# Altium PCB Xbee_Coordinator.PcbDoc
Units mm, origin at the board's own origin, x right, y up, seen from the top; angles counter-clockwise.
Board outline 152.4 x 101.6 mm, 2 copper layers (Top Layer, Bottom Layer); 19 components, 27 nets, 107 pads, 0 vias.
Unrouted connection lines stored in the file: 37.
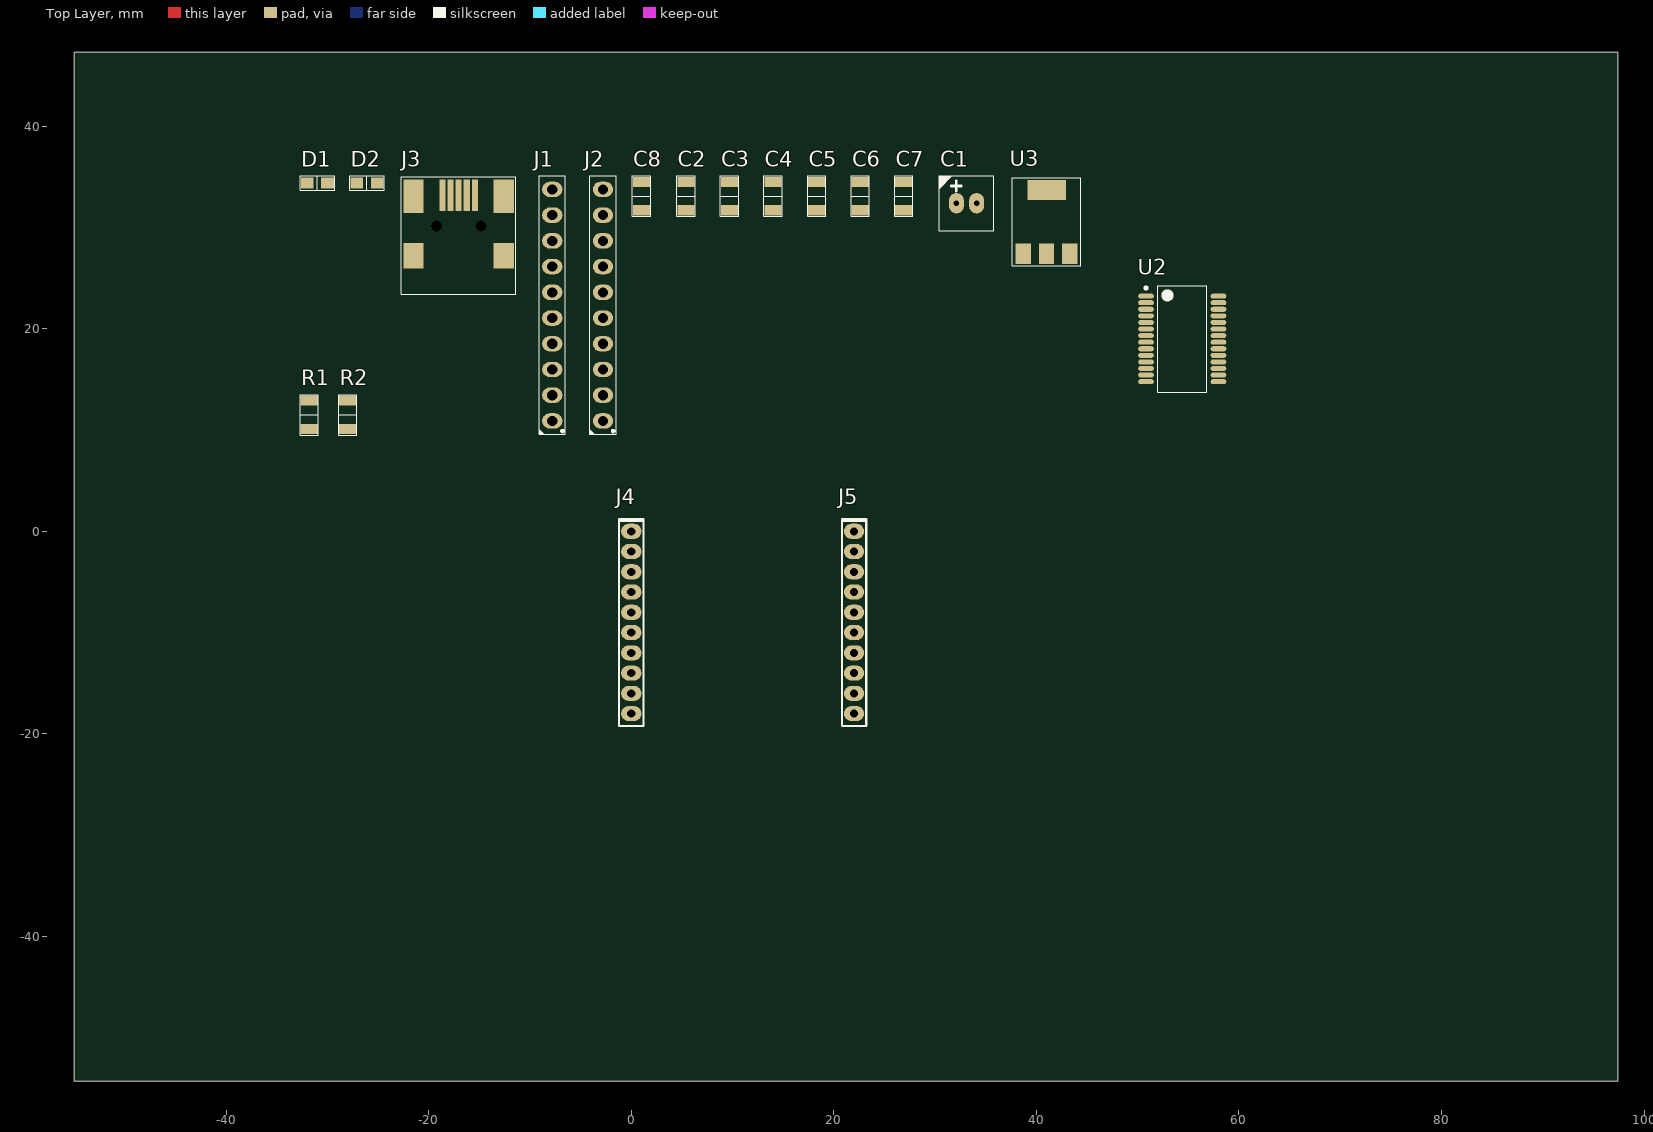
[diagram p0: Top Layer view]
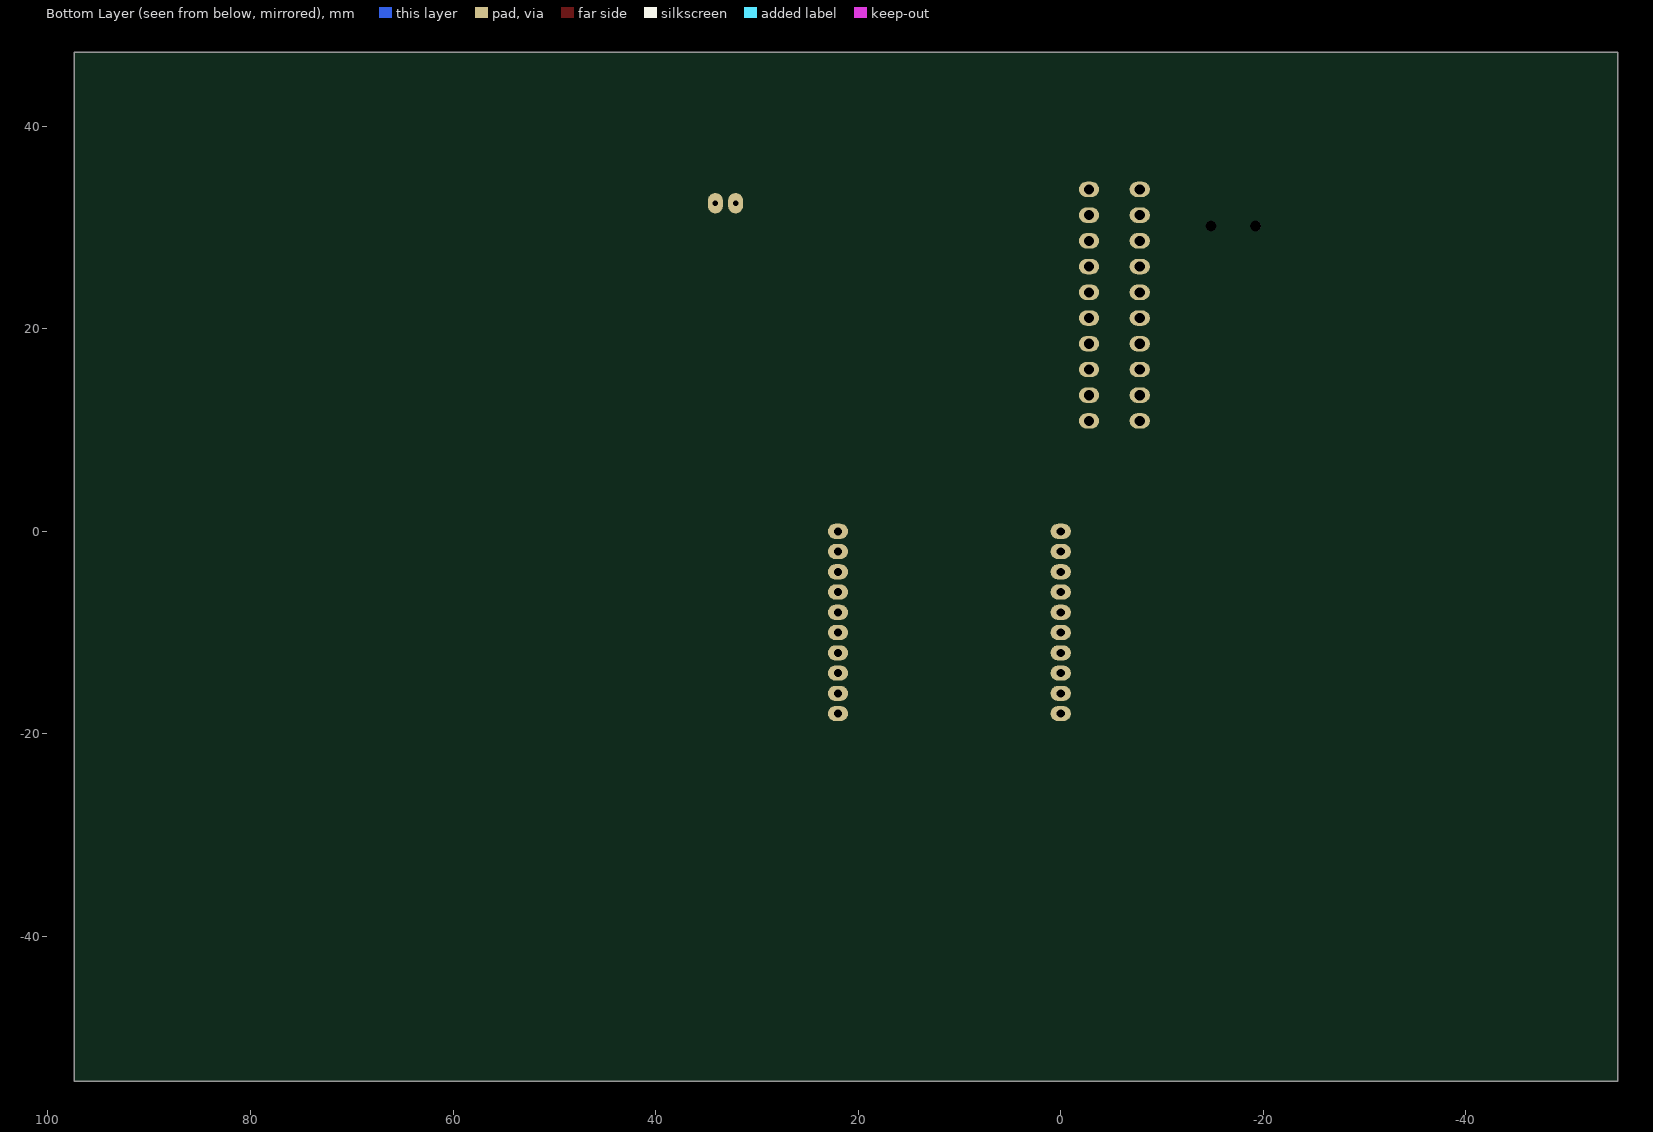
[diagram p1: Bottom Layer view, seen from below]

## Layer stack, top to bottom
Top Solder: solder mask 0.0102, Solder Resist, Dk 3.5
Top Layer: signal copper 0.0356
Dielectric 1: dielectric 0.32, FR-4, Dk 4.8
Bottom Layer: signal copper 0.0356
Bottom Solder: solder mask 0.0102, Solder Resist, Dk 3.5

## Board outline
-55,-54.3 97.4,-54.3 97.4,47.3 -55,47.3

## Design rules (kind name [scope] priority, off if disabled: settings)
Clearance [All] p1: gap=0.254 ignorepadtopadclearanceinfootprint=FALSE except(0: Arc-Hole Track-Hole SMDPad-Hole THPad-Hole Via-Hole Fill-Hole Poly-Hole Region-Hole Text-Hole; 0.1: Arc-SMDPad Track-SMDPad SMDPad-SMDPad)
PolygonConnect [All] p1: connectstyle=Relief reliefconductorwidth=0.254 reliefentries=4 polygonreliefangle="90 Angle" airgapwidth=0.254
RoutingVias [All] p1: holewidth=1 width=1.5 viastyle="Through Hole" minholewidth=0.5 minwidth=1 maxholewidth=0.6 maxwidth=2.54
SolderMaskExpansion [All] p1: expansion=0.102 istentingtop=FALSE
Width [All] p1: maxlimit=1 minlimit=0.254 preferedwidth=0.3 minimp=50.000000 maximp=50.000000 favimp=50.000000
30 further rules are at their usual default settings.

## Components (designator, comment, footprint, x,y, rotation, side; value= is the part's Value field where it differs from the comment)
C1 "1uF" "5x11 Radial Capacitor" 32.1,32.4 r0 top
C2 "10uF" C_1206 5.4,31.7 r0 top
C3 "1uF" C_1206 9.7,31.7 r0 top
C4 "0.1uF" C_1206 14,31.7 r0 top
C5 "0.1uF" C_1206 18.3,31.7 r0 top
C6 "1uF" C_1206 22.6,31.7 r0 top
C7 "10uF" C_1206 26.9,31.7 r0 top
C8 "0.1uF" C_1206 1,31.7 r0 top
D1 "LED_0805" LED_0805 -32,34.4 r0 top
D2 "LED_0805" LED_0805 -27.1,34.4 r0 top
J1 "Pin_Header_1x10Pos_2.54mm" PinHeader_1x10Pin_2.54mm -7.8,10.9 r90 top
J2 "Pin_Header_1x10Pos_2.54mm" PinHeader_1x10Pin_2.54mm -2.8,10.9 r90 top
J3 "Mini_USB" Mini_USB -21.5,27.2 r0 top
J4 "Header_1x10_2mm" "Header 1x10 2mm" 0,0 r270 top
J5 "Header_1x10_2mm" "Header 1x10 2mm" 22,0 r270 top
R1 "470" R_1206 -31.8,10.1 r0 top
R2 "1K" R_1206 -28,10.1 r0 top
U2 "FT232RL" SSOP-28Pin 54.4,19 r0 top
U3 "NCP1117 3.3V" "NCP1117 3.3V" 38.7,27.4 r0 top

## Footprints (in the part's own frame and the unit in brackets; to place one, negate y for a bottom-side part, rotate by r counter-clockwise, add the part's x,y. Pads: shape width x height; smd on the part's side, far side on the other; paste and mask are expansions set on the pad)
"5x11 Radial Capacitor" [mm]
  oval 1.5x2 hole 0.55 mask+0.05: 1(0,0) 2(2,0)
  silkscreen extent -1.7,-2.7 3.7,2.7, body extent -1.5,-2.5 3.5,2.5, height 11.2
C_1206 [mm]
  rect 1.7x1 smd mask+0.02: 1(0,0) 2(0,2.8)
  silkscreen extent -0.9,-0.6 0.9,3.4, body extent -0.9,-0.3 0.9,3.1, height 0.88
"Header 1x10 2mm" [mm]
  oval 1.5x2 hole 0.8: 1(0,0) 2(2,0) 3(4,0) 4(6,0) 5(8,0) 6(10,0) 7(12,0) 8(14,0) 9(16,0) 10(18,0)
  silkscreen extent -1.2,-1.2 19.2,1.2, body extent -1.25,-1.2 19.25,1.2, height 4.41
LED_0805 [mm]
  rect 1.25x1.1 smd mask+0.05: 1(0,0) 2(2,0)
  silkscreen extent -0.7,-0.7 2.7,0.7, body extent -0.1,-0.62 1.9,0.62, height 1.1
Mini_USB [mm]
  rect 0.6x3.1 smd mask+0.05: 1(2.85,6) 2(3.65,6) 3(4.45,6) 4(5.25,6) 5(6.05,6)
  rect 2x2.5 smd mask+0.05: ""(0,0) ""(8.9,0)
  rect 2x3.3 smd mask+0.05: ""(0,5.9) ""(8.9,5.9)
  round 1 hole 1.1 mask+0.02: ""(2.25,2.95) ""(6.65,2.95)
  silkscreen extent -1.2,-3.8 10.1,7.8, body extent -0.5,-2.9 9.4,6.3, height 4.14
"NCP1117 3.3V" [mm]
  rect 1.5x2 smd mask+0.05: 1(0,0) 2(2.3,0) 3(4.6,0)
  rect 3.8x2 smd mask+0.05: ""(2.3,6.3)
  silkscreen extent -1.1,-1.2 5.7,7.5, body extent -0.95,-0.5 5.55,6.5, height 1.73
PinHeader_1x10Pin_2.54mm [mm]
  oval 1.524x2 hole 1: 1(0,0) 2(2.54,0) 3(5.08,0) 4(7.62,0) 5(10.16,0) 6(12.7,0) 7(15.24,0) 8(17.78,0) 9(20.32,0) 10(22.86,0)
  silkscreen extent -1.3,-1.3 24.2,2.1, body extent -1.25,-1.26 24.15,1.28, height 9.4
R_1206 [mm]
  rect 1.7x1 smd mask+0.02: 1(0,0) 2(0,2.8)
  silkscreen extent -0.9,-0.6 0.9,3.4, body extent -0.83,-0.2 0.83,3, height 0.63
SSOP-28Pin [mm] "SOP, 28-Leads, Body 10,28x5,30mm, Pitch 0,65mm, IPC Medium Density"
  oval 1.55x0.5 smd mask+0.05: 1(-3.575,4.225) 2(-3.575,3.575) 3(-3.575,2.925) 4(-3.575,2.275) 5(-3.575,1.625) 6(-3.575,0.975) 7(-3.575,0.325) 8(-3.575,-0.325) 9(-3.575,-0.975) 10(-3.575,-1.625) 11(-3.575,-2.275) 12(-3.575,-2.925) 13(-3.575,-3.575) 14(-3.575,-4.225) 15(3.575,-4.225) 16(3.575,-3.575) 17(3.575,-2.925) 18(3.575,-2.275) 19(3.575,-1.625) 20(3.575,-0.975) 21(3.575,-0.325) 22(3.575,0.325) 23(3.575,0.975) 24(3.575,1.625) 25(3.575,2.275) 26(3.575,2.925) 27(3.575,3.575) 28(3.575,4.225)
  silkscreen extent -3.7,-5.25 2.4,5.25, body extent -3.88,-5.16 3.88,5.17, height 2.16

## Part data
C1: library part Cap_Pol_5x11, "5x11 Radial Polarized Capacitor"
C2 C3 C4 C5 C6 C7 C8: library part C_1206(3216), "1206(3216) package capacitor"
R1 R2: library part R_1206(3216), "1206(3216) package resistor"
U2: "FT232RL_USB-Converter"
U3: "NCP1117-3.3V Linear Regulator"

## Nets (pads, with @x,y where several pads share a name; then routed paths per layer and width w, separated by ;. In a path a pad name is that pad's centre, name@x,y a point inside that pad or via, vN(x,y) a via of type N, cw(c..) or ccw(c..) an arc to the next point about the centre after c; other vN are vias at no path point)
3.3V: U3.2
CTS: J2.9 J5.9 U2.11
DIO0: J2.1 J5.1
DIO1: J2.2 J5.2
DIO2: J2.3 J5.3
DIO3: J2.4 J5.4
DIO4: J2.10 J5.10
DIO5: J2.6 J5.6
DIO9: J2.8 J5.8
DIO11: J1.7 J4.7
DIO12: J1.4 J4.4
DTR: J1.9 J4.9 U2.2
GND: J1.10 J3.5 J4.10 U2.7 U2.18 U2.21 U2.25 U2.26 U3.1
NetC8_7: U2.4 U2.17
NetD1_9: 
NetD2_9: 
RES: J1.8 J4.8
RSSI: J1.6 J4.6
RST: J1.5 J4.5
RTS: J2.5 J5.5 U2.3
RX: J1.3 J4.3 U2.1
TX: J1.2 J4.2 U2.5
USBDM: J3.2 U2.16
USBDP: J3.3 U2.15
VBUS: J3.1 U2.20 U3.3
VDD: J1.1 J4.1
VREF: J2.7 J5.7
pads on no net: C1.1 C1.2 C2.1 C2.2 C3.1 C3.2 C4.1 C4.2 C5.1 C5.2 C6.1 C6.2 C7.1 C7.2 C8.1 C8.2 D1.1 D1.2 D2.1 D2.2 J3. J3.4 R1.1 R1.2 R2.1 R2.2 U2.6 U2.8 U2.9 U2.10 U2.12 U2.13 U2.14 U2.19 U2.22 U2.23 U2.24 U2.27 U2.28 U3.